# Altium PCB 监测站 - 应变计小板.PcbDoc
Units mm, origin at the board's own origin, x right, y up, seen from the top; angles counter-clockwise.
Board outline 152.4 x 101.6 mm, 2 copper layers (Top Layer, Bottom Layer); 6 components, 12 nets, 34 pads, 0 vias.
Unrouted connection lines stored in the file: 15.
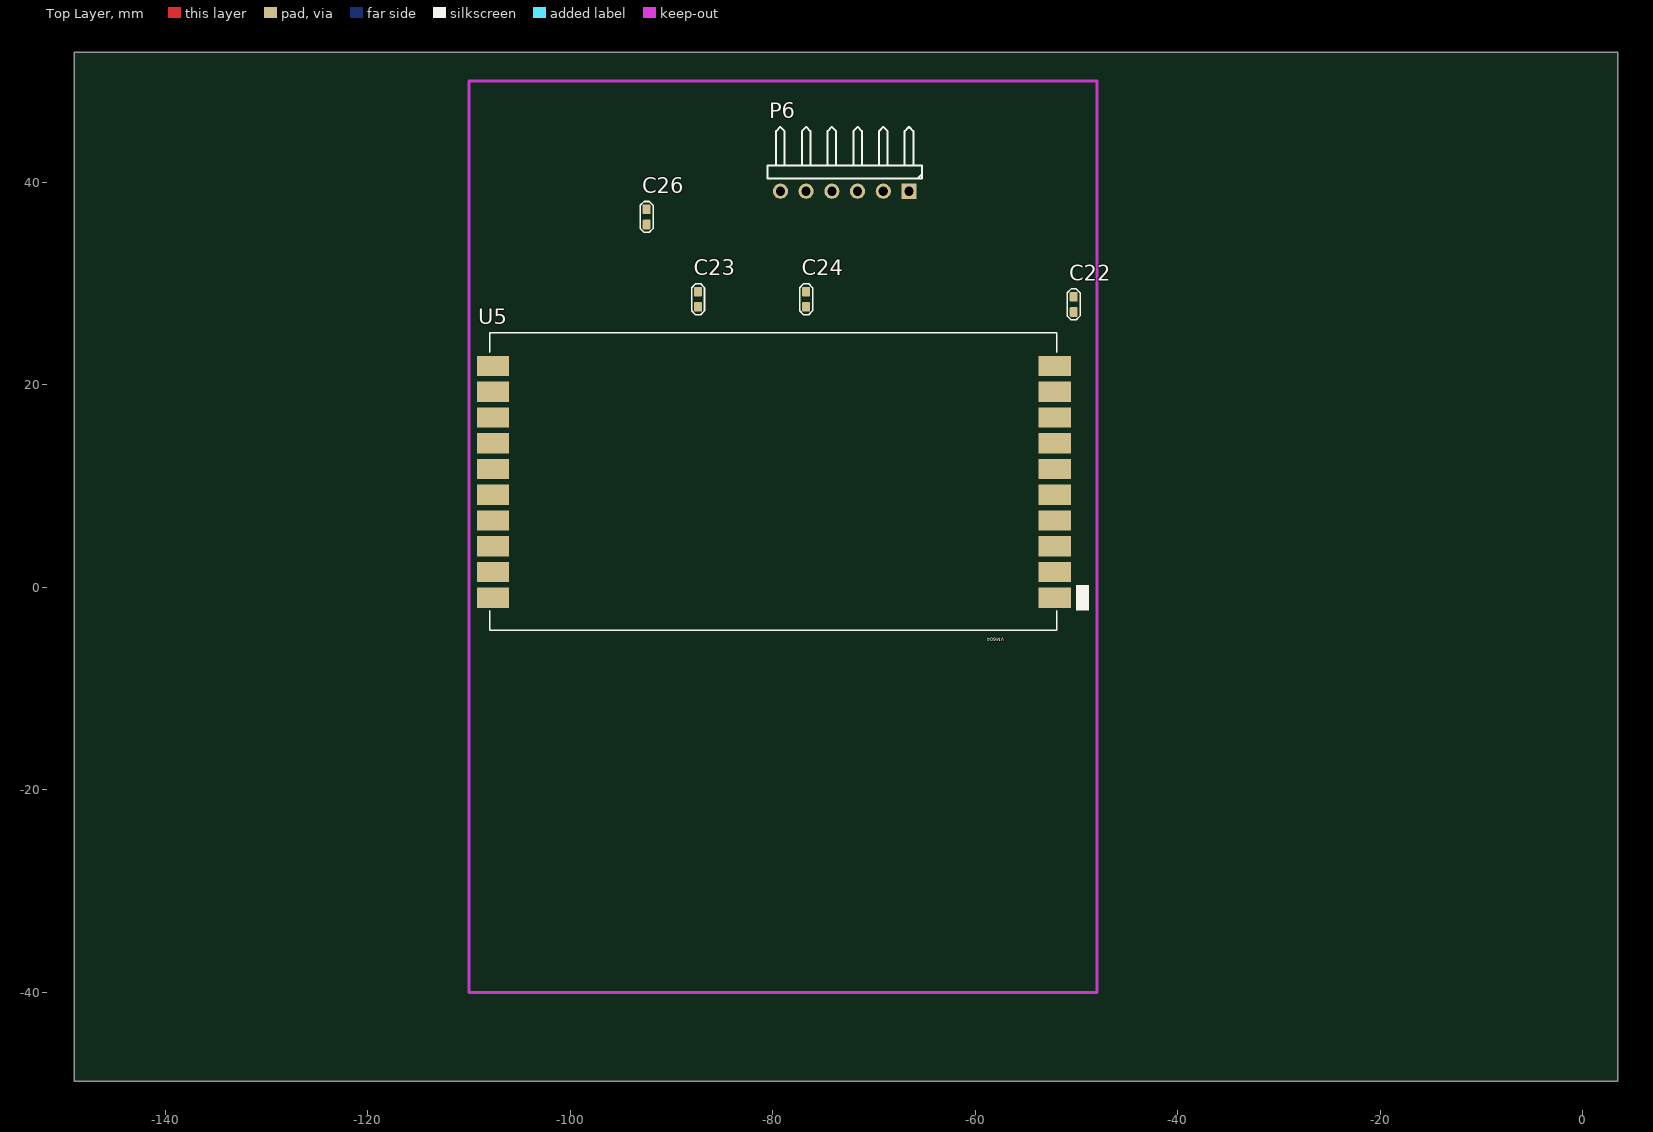
[diagram p0: Top Layer view]
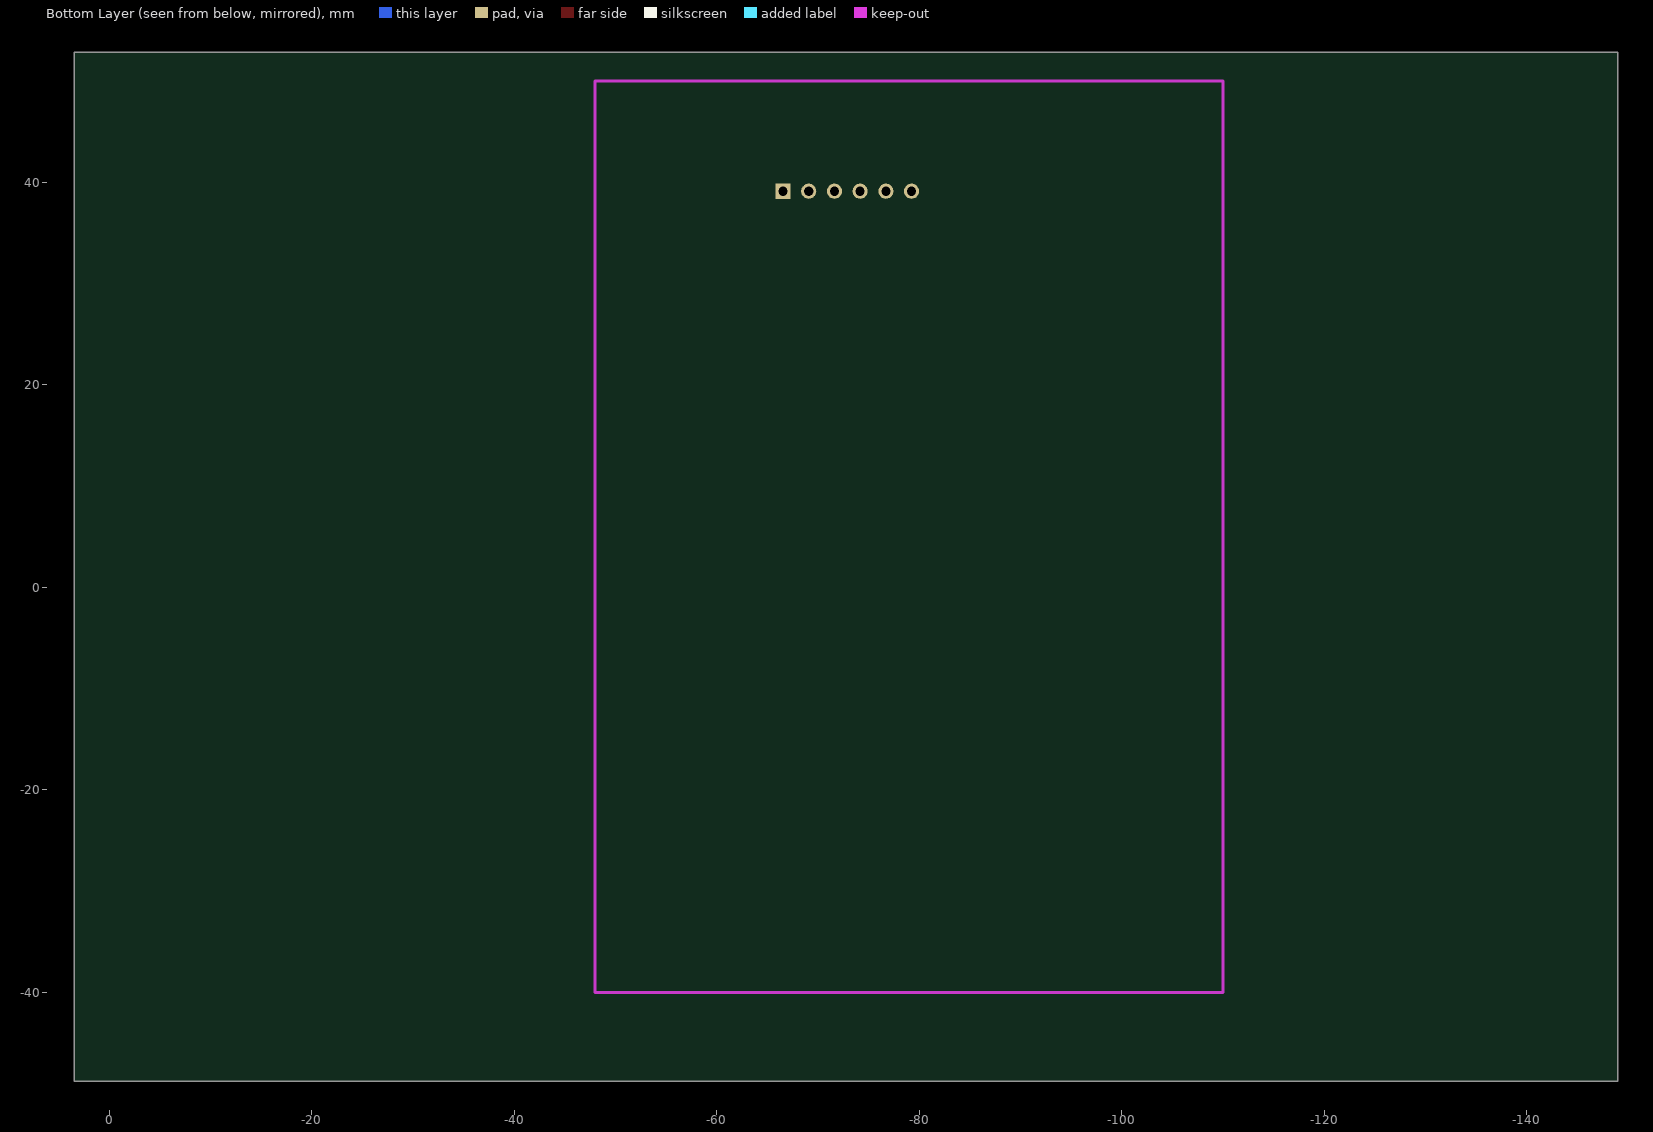
[diagram p1: Bottom Layer view, seen from below]

## Layer stack, top to bottom
Top Layer: signal copper 0.0356
Dielectric: dielectric 0.32, FR-4, Dk 4.8
Bottom Layer: signal copper 0.0356

## Board outline
-148.971,-48.768 3.429,-48.768 3.429,52.832 -148.971,52.832

## Design rules (kind name [scope] priority, off if disabled: settings)
Clearance [All] p1: gap=0.2
ComponentClearance [All] p1: gap=0.254 collisioncheckmode=3 verticalgap=0.1 showdistances=FALSE
MinimumSolderMaskSliver [All] p1: minsoldermaskwidth=0
PolygonConnect [All] p1: connectstyle=Relief reliefconductorwidth=0.254 reliefentries=4 polygonreliefangle="90 Angle"
RoutingVias [All] p1: holewidth=0.711 width=1.27 viastyle="Through Hole" minholewidth=0.711 minwidth=1.27 maxholewidth=0.711 maxwidth=1.27
SilkToSilkClearance [All] p1: silktosilkclearance=0
SilkscreenOverComponentPads [All] p1: minsilkscreentomaskgap=0
SolderMaskExpansion [All] p1: expansion=0.102
TestPointUsage [All] p1: valid=0 allowmultiple=FALSE
Testpoint [All] p1: side=15 testpointundercomponent=TRUE minsize=1.016 maxsize=2.54 preferedsize=1.524 minholesize=0 maxholesize=1.016 preferedholesize=0.813 testpointgrid=0.025 style=1023 order=0-112345678
Width [All] p1: maxlimit=0.254 minlimit=0.254 preferedwidth=0.254
20 further rules are at their usual default settings.

## Components (designator, comment, footprint, x,y, rotation, side; value= is the part's Value field where it differs from the comment)
C22 "106" C0603 -50.292,27.94 r90 top
C23 "104" C0603 -87.376,28.448 r90 top
C24 "106" C0603 -76.708,28.448 r90 top
C26 "104" C0603 -92.456,36.576 r90 top
P6 "应变计接口" HDR1X6H -66.548,39.116 r180 top
U5 "VM604" VM604 -58.42,5.588 r180 top

## Footprints (in the part's own frame and the unit in brackets; to place one, negate y for a bottom-side part, rotate by r counter-clockwise, add the part's x,y. Pads: shape width x height; smd on the part's side, far side on the other; paste and mask are expansions set on the pad)
C0603 [mm]
  rrect30% 0.95x0.8 smd: 1(-0.75,0) 2(0.75,0)
  silkscreen extent -1.52,-0.64 1.52,0.64, body extent -0.81,-0.41 0.81,0.41, height 0.8
HDR1X6H [mm] "Connector; Header; 6 Position; Right Angle"
  rect 1.5x1.5 hole 0.9: 1(0,0)
  round 1.5 hole 0.9: 2(2.54,0) 3(5.08,0) 4(7.62,0) 5(10.16,0) 6(12.7,0)
  silkscreen extent -1.27,-6.35 13.97,-1.27
VM604 [mm]
  rect 3.2x2 smd: 1(-6.277,6.604) 2(-6.277,4.064) 3(-6.277,1.524) 4(-6.277,-1.016) 5(-6.277,-3.556) 6(-6.277,-6.096) 7(-6.277,-8.636) 8(-6.277,-11.176) 9(-6.277,-13.716) 10(-6.277,-16.256) 11(49.203,-16.256) 12(49.203,-13.716) 13(49.203,-11.176) 14(49.203,-8.636) 15(49.203,-6.096) 16(49.203,-3.556) 17(49.203,-1.016) 18(49.203,1.524) 19(49.203,4.064) 20(49.203,6.604)
  silkscreen extent -9.65,-19.55 49.52,9.83

## Part data
C22 C23 C24 C26: library part CAP_1, "贴片电容"
P6: library part MHDR1X16, "航空插排（座）16-Pin"
U5: library part Component_1, "振弦读数模块"

## Nets (pads, with @x,y where several pads share a name; then routed paths per layer and width w, separated by ;. In a path a pad name is that pad's centre, name@x,y a point inside that pad or via, vN(x,y) a via of type N, cw(c..) or ccw(c..) an arc to the next point about the centre after c; other vN are vias at no path point)
GND: C22.1 C23.1 C24.1 C26.1 U5.9 U5.11
S1+: P6.1 U5.2
S2+: P6.5 U5.3
S3+: U5.4
S4+: U5.5
S-: P6.2 P6.6 U5.1
T1: P6.3 U5.19
T2: U5.18
T3: U5.17
T4: U5.16
V3.3V: C22.2 C23.2 U5.6 U5.10
VOUT_5V: C24.2 C26.2 U5.20
pads on no net: P6.4 U5.7 U5.8 U5.12 U5.13 U5.14 U5.15

## Keep-outs
Keep-Out Layer:
  lines w0.3: -110,-40 -110,50 -48,50 -48,-40 -110,-40